# Altium PCB Control Board.PcbDoc
Units mm, origin at the board's own origin, x right, y up, seen from the top; angles counter-clockwise.
Board outline 55 x 12 mm, 2 copper layers (Top Layer, Bottom Layer); 18 components, 13 nets, 57 pads, 0 vias.
Unrouted connection lines stored in the file: 30.
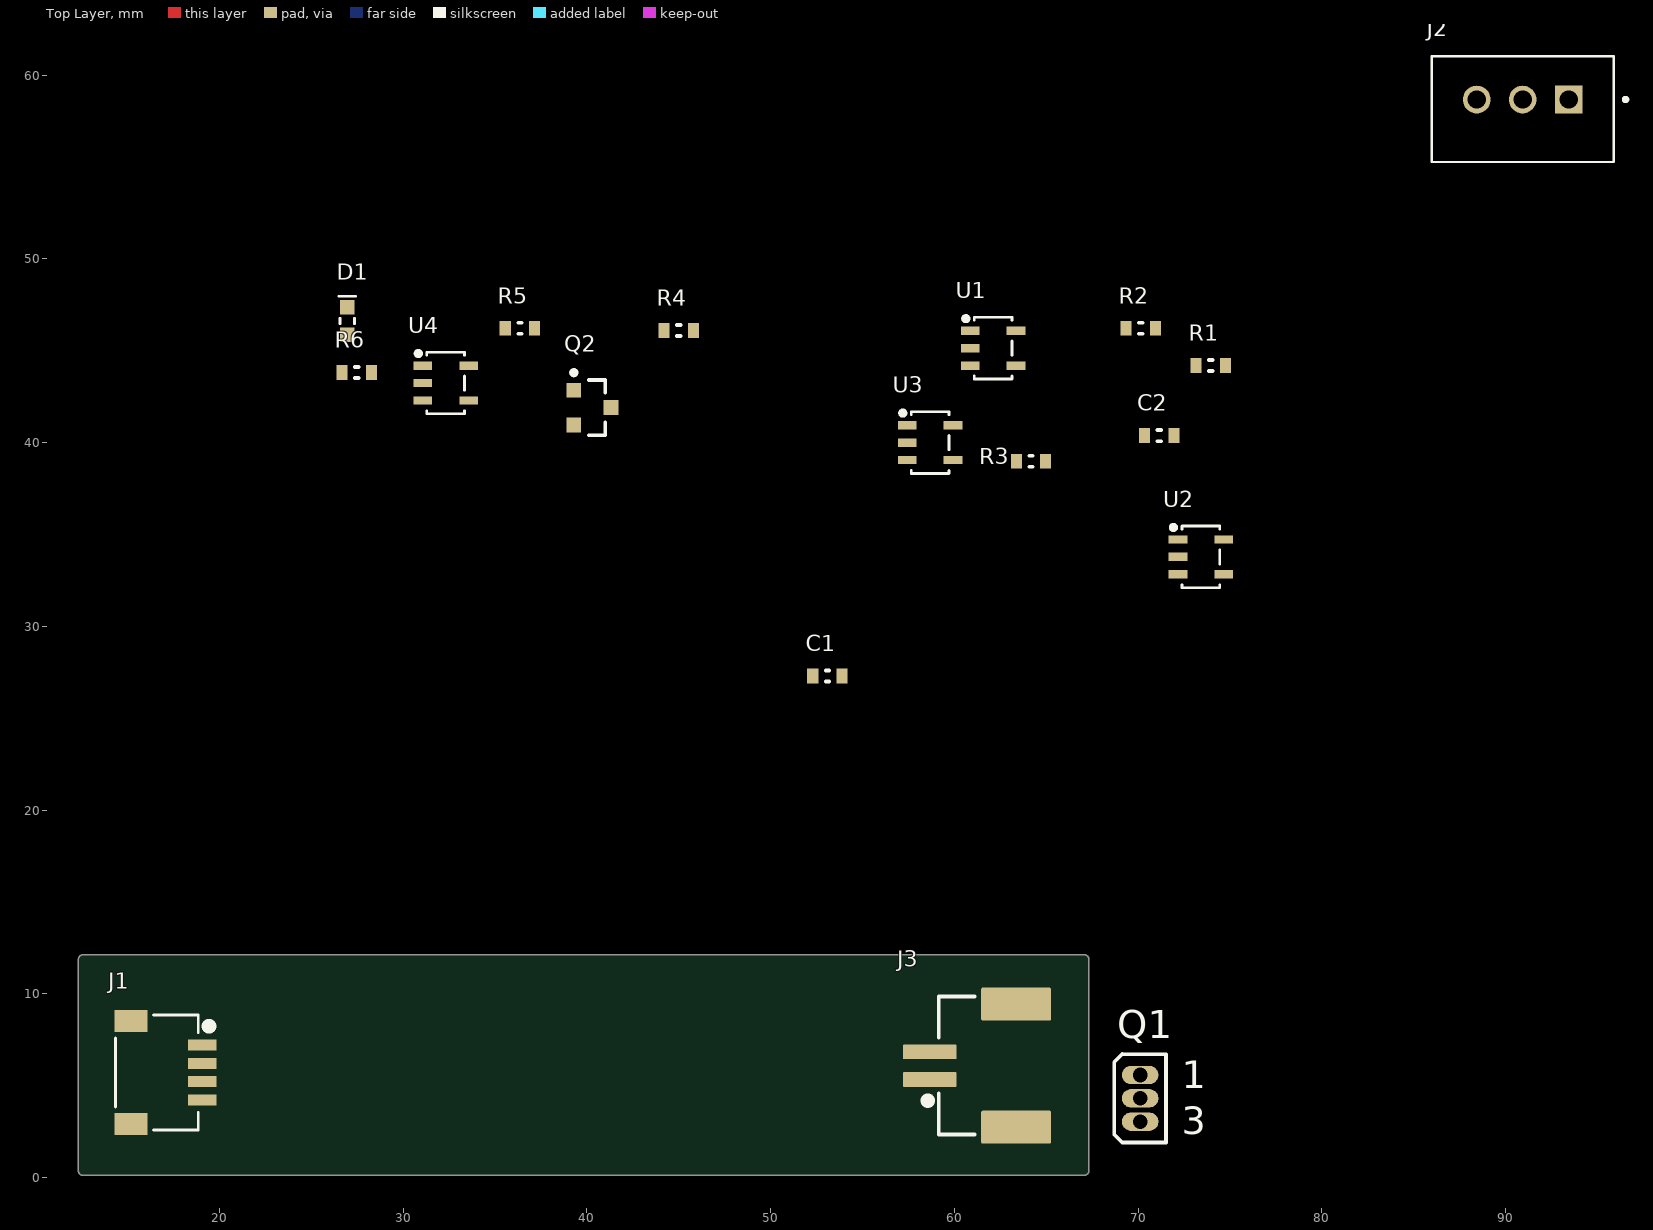
[diagram p0: Top Layer view]
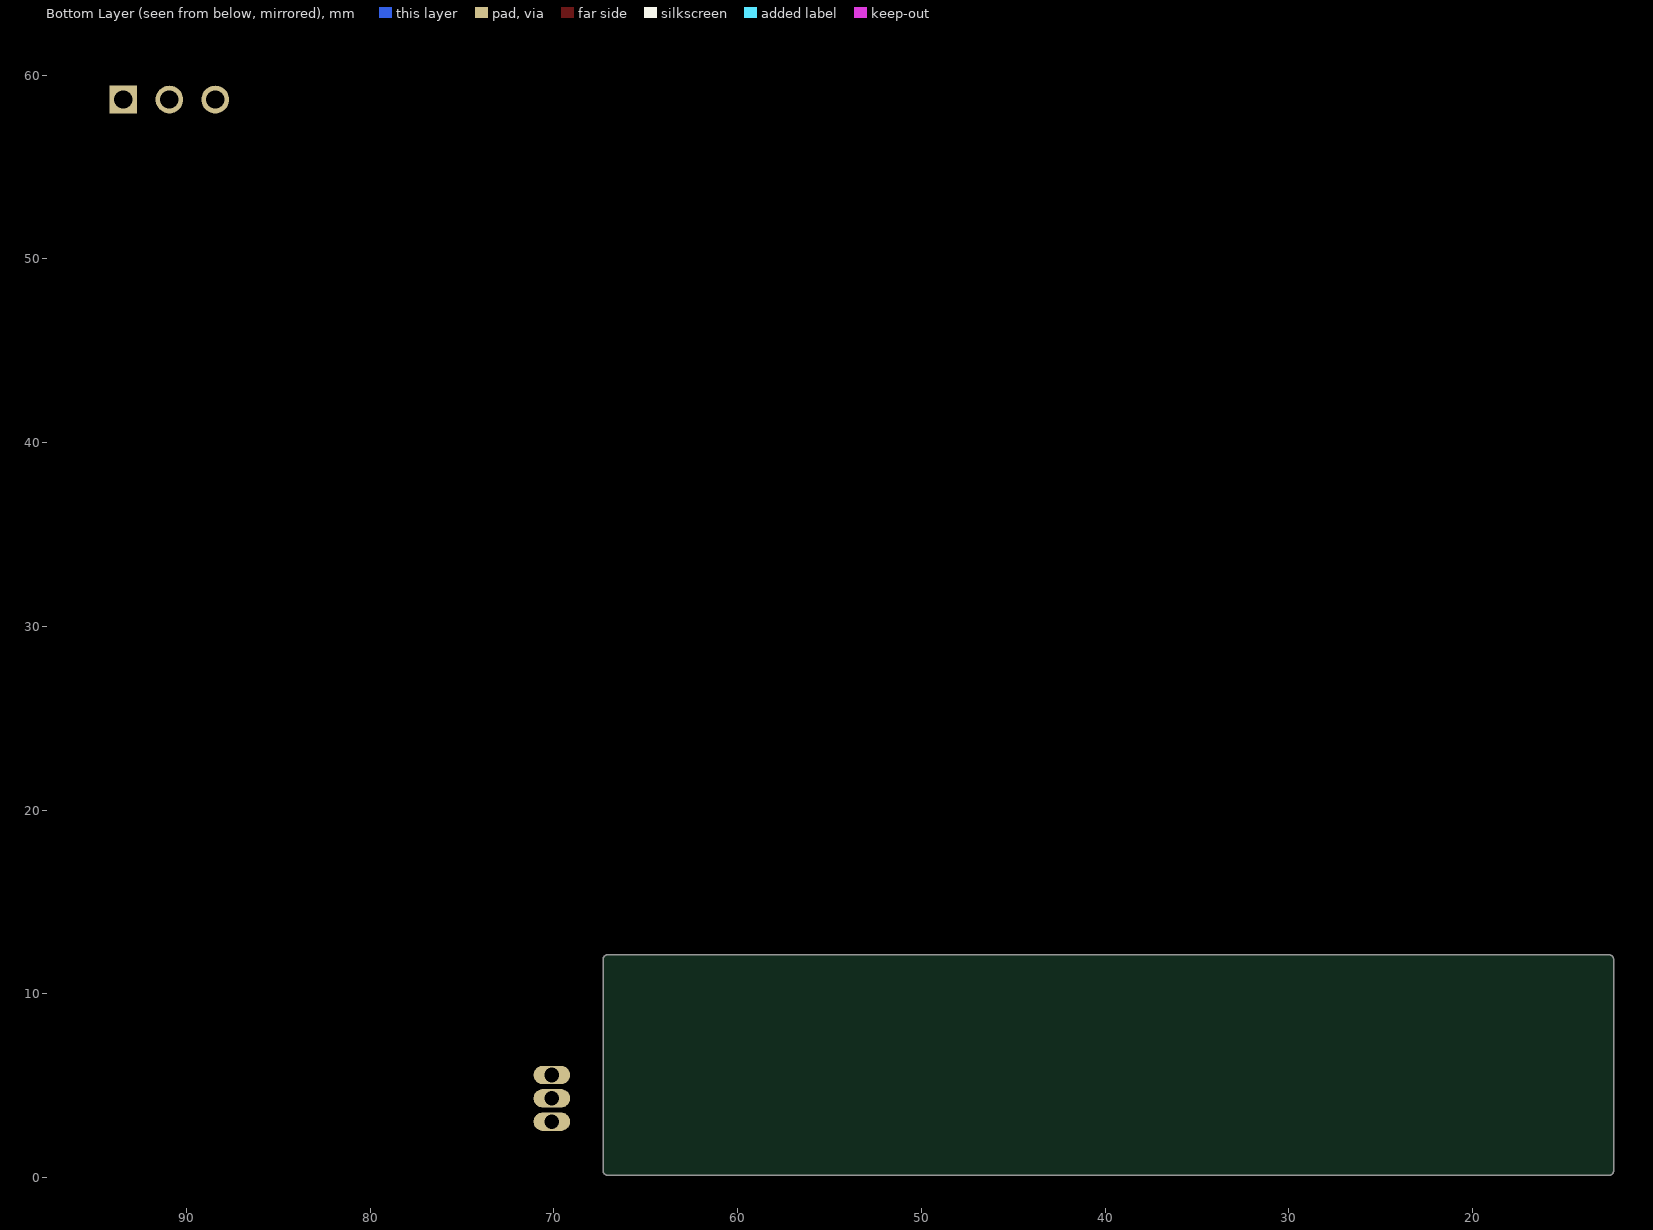
[diagram p1: Bottom Layer view, seen from below]

## Layer stack, top to bottom
Top Solder: solder mask 0.0102, Solder Resist, Dk 3.5
Top Layer: signal copper 0.0356
Dielectric 1: dielectric 0.32, FR-4, Dk 4.8
Bottom Layer: signal copper 0.0356
Bottom Solder: solder mask 0.0102, Solder Resist, Dk 3.5

## Board outline
12.319,0.381 12.319,11.873 cw(c12.573,11.873) 12.573,12.127 67.065,12.127 cw(c67.065,11.873) 67.319,11.873 67.319,0.381 cw(c67.065,0.381) 67.065,0.127 12.573,0.127 cw(c12.573,0.381)

## Design rules (kind name [scope] priority, off if disabled: settings)
Clearance [All] p1: gap=0.254 ignorepadtopadclearanceinfootprint=FALSE except(0: Arc-Hole Track-Hole SMDPad-Hole THPad-Hole Via-Hole Fill-Hole Poly-Hole Region-Hole Text-Hole)
PolygonConnect [All] p1: connectstyle=Relief reliefconductorwidth=0.254 reliefentries=4 polygonreliefangle="90 Angle" airgapwidth=0.254
RoomDefinition "Control Board" [InComponentClass('Control Board')] p1: confinementstyle=ConfineIn formatcopy=TRUE lockcomponents=FALSE outline 68.453,1.651 73.66,1.651 73.66,9.525 68.453,9.525
RoutingVias [All] p1: holewidth=0.711 width=1.27 viastyle="Through Hole" minholewidth=0.711 minwidth=1.27 maxholewidth=0.711 maxwidth=1.27
SolderMaskExpansion [All] p1: expansion=0.102 istentingtop=FALSE
Width [All] p1: maxlimit=0.254 minlimit=0.254 preferedwidth=0.254
30 further rules are at their usual default settings.

## Components (designator, comment, footprint, x,y, rotation, side; value= is the part's Value field where it differs from the comment)
C1 "0.10uF" 0603 53.086,27.305 r0 top
C2 "0.10uF" 0603 71.149,40.386 r0 top
D1 "0603 2V" "0603 - LED" 26.953,46.621 r90 top
J1 "SM04B-SRSS-TB(LF)(SN)" CONN_SM04B_JST 19.05,7.223 r270 top
J2 "B3B-XH-A(LF)(SN)" JST_B3B-XH-A(LF)(SN) 90.923,58.674 r180 top
J3 "SM02B-ZESS-TB(LF)(SN)" CONN_SM02B-ZESS-TB_JST 62.357,6.096 r90 top
Q1 "MOSFET-P" E3 70.104,4.318 r0 top
Q2 "CJ2305" JSCJ-SOT23-3_V 40.294,41.91 r0 top
R1 "JUMPER" 0603 73.943,44.196 r0 top value=0
R2 "JUMPER" 0603 70.133,46.228 r0 top value=0
R3 "JUMPER" 0603 64.164,38.989 r0 top value=0
R4 "JUMPER" 0603 44.987,46.101 r0 top value=0
R5 "1.1k" 0603 36.351,46.228 r0 top
R6 "JUMPER" 0603 27.461,43.815 r0 top value=0
U1 "REF2030QDDCRQ1" SOT-23-5_MC_MCH-L 60.862,46.096 r0 top
U2 "MCP6541RT-E/OT" SOT-23-5_MC_MCH-L 72.165,34.732 r0 top
U3 "SN74AHC1G08DBV3" SOT-23-5_MC_MCH-L 57.433,40.955 r0 top
U4 "MCP6541RT-E/OT" SOT-23-5_MC_MCH-L 31.068,44.196 r0 top

## Footprints (in the part's own frame and the unit in brackets; to place one, negate y for a bottom-side part, rotate by r counter-clockwise, add the part's x,y. Pads: shape width x height; smd on the part's side, far side on the other; paste and mask are expansions set on the pad)
0603 [mm] "Chip Resistor, 2-Leads, Body 1.60x0.80mm, IPC High Density"
  rect 0.6x0.8 smd mask+0.1: 1(-0.8,0) 2(0.8,0)
  silkscreen extent -0.1,-0.3 0.1,0.3, body extent -0.8,-0.4 0.8,0.4, height 0.6
"0603 - LED" [mm]
  rect 0.8x0.8 smd: 1(-0.75,0) 2(0.75,0)
  silkscreen extent -0.15,-0.45 1.35,0.45, body extent -0.8,-0.4 0.8,0.4, height 0.65
CONN_SM02B-ZESS-TB_JST [mm]
  rrect10% 1.8x3.8 smd: 0(-3.35,-0.994) 0(3.35,-0.994)
  rrect10% 0.8x2.9 smd: 1(-0.75,3.706) 2(0.75,3.706)
  silkscreen extent -3.75,1.27 3.76,3.81, body extent -3.75,-4.29 3.75,4.41, height 5.9
CONN_SM04B_JST [mm]
  rect 1.2x1.8 smd: 0(-1.3,-3.875) 0(4.3,-3.875)
  rect 0.6x1.55 smd: 1(0,0) 2(1,0) 3(2,0) 4(3,0)
  silkscreen extent -1.62,-4.7 4.62,0.38, body extent -1.5,-4.58 4.5,0.37, height 2.96
E3 [mm] "TO, Flat Index; 3 In-Line, Axial Leads; Body Dia. 4.6mm; Lead Dia. 0.5 mm (max)"
  oval 2x1 hole 0.8: 1(0,1.27) 2(0,0) 3(0,-1.27)
  silkscreen extent -1.41,-2.41 1.41,2.41
JSCJ-SOT23-3_V [mm] "SOT23, 3-Leads, Body 3x1.4mm, Pitch 0.95mm"
  rect 0.8x0.8 smd: 1(-1.01,0.95) 2(-1.01,-0.95) 3(1.01,0)
  silkscreen extent -1.13,-1.5 0.7,2.02, body extent -1.28,-1.5 1.28,1.5, height 1.15
JST_B3B-XH-A(LF)(SN) [mm]
  rect 1.508x1.508 hole 1: 1(-2.5,0)
  round 1.508 hole 1: 2(0,0) 3(2.5,0)
  silkscreen extent -5.7,-2.35 4.95,3.4, body extent -4.96,-2.35 4.94,3.4, height 7
SOT-23-5_MC_MCH-L [mil]
  rect 40x18 smd: 1(0,0) 2(0,-37.4) 3(0,-74.8) 4(98,-74.8) 5(98,0)
  silkscreen extent -15,-103 90,31, body extent -14,-98 112,24, height 57

## Part data
C1 C2: library part "CAP 0.10uF 16V", "CAP CER 0.10UF 16V X5R 0603", Operating Temperature="-55°C ~ 85°C", Package=0603/0805, Rating=16V, Temperature Coefficient=X5R, Tolerance=10%, Part Number="CAP 0.10uF 16V"
D1: library part "LED GREEN SMD 0603", "LED Uni-Color Green 574nm 2-Pin Chip LED T/R", Current Rating=20mA, Manufacturer Part Number 1=LTST-C190KGKT, Supplier Part Number 1=160-1435-1-ND, Voltage Rating - DC=2V, Part Number="LED GREEN SMD 0603", Pin Count=2, Supplier 1=Digi-Key, Supplier URL 1=https://www.digikey.ca/en/products/detail/lite-on-inc/LTST-C190KGKT/386815?s=N4IgTCBcDaIIwDYAMBaOAWAzAVjSgcgCIgC6AvkA
J1: library part "CN HDR 4POS JST SH_SR", "CONN HEADER SMD R/A 4POS 1MM", Mfr_Name=JST, Supplier Part Number 1=455-1804-1-ND, Copyright="Copyright (C) 2023 Ultra Librarian. All rights reserved.", Digi-Key_Part_Number_1=455-1804-2-ND, Digi-Key_Part_Number_2=455-1804-1-ND, Digi-Key_Part_Number_3=455-1804-6-ND, Manufacturer_Part_Number=SM04B-SRSS-TB(LF)(SN), Part Number="CN HDR 4POS JST SH_SR", Pin Count=4, RefDes=RefDes, Supplier 1=Digi-Key, Supplier URL 1=https://www.digikey.ca/en/products/detail/jst-sales-america-inc/SM04B-SRSS-TB-LF-SN/926710, Type=DEV
J2: library part "CN HDR 3POS JST XH", "Connector Header Through Hole 3 position 0.098 (2.50mm)", Package=None, Supplier Part Number 1=455-2248-ND, Availability="In Stock", Check_prices=https://www.snapeda.com/parts/B3B-XH-A(LF)(SN)/JST%20Sales%20America%20Inc./view-part/231271/?ref=eda, Manufacturer Part Number 1=B3B-XH-A(LF)(SN), MF="JST Sales", MP=B3B-XH-A(LF)(SN), Part Number="CN HDR 3POS JST XH", Price=None, SnapEDA_Link=https://www.snapeda.com/parts/B3B-XH-A(LF)(SN)/JST%20Sales%20America%20Inc./view-part/231271/?ref=snap, Supplier 1=Digi-Key, Supplier URL 1=https://www.digikey.com/en/products/detail/jst-sales-america-inc/B3B-XH-A-LF-SN/1651046
J3: library part "CN HDR 2POS JST ZE", "CONN HEADER SMD R/A 2POS 1.5MM", Manufacturer_Part_Number=SM02B-ZESS-TB, Mfr_Name=JST, Supplier Part Number 1=455-2395-1-ND, Copyright="Copyright (C) 2023 Ultra Librarian. All rights reserved.", Part Number="CN HDR 2POS JST ZE", Pin Count=2, RefDes=RefDes, Supplier 1=Digi-Key, Supplier URL 1=https://www.digikey.ca/en/products/detail/jst-sales-america-inc/SM02B-ZESS-TB-LF-SN/1887001, Type=DEV
Q1: "P-Channel MOSFET", LatestRevisionDate=17-Jul-2002, LatestRevisionNote="Re-released for DXP Platform.", PackageDescription="TO, Flat Index; 3 In-Line, Axial Leads; Body Dia. 4.6mm; Lead Dia. 0.5 mm (max)", PackageReference=E3, PackageVersion=1995/1996, Published=8-Jun-2000, Publisher="Altium Limited"
Q2: library part CMP-013-00015-3, "P-Channel Plastic Encapsulate MOSFET, 12 V, 4.1 A, 3-Pin SOT23, Tape and Reel", Case/Package=SOT23-3, Manufacturer="Jiangsu Changjiang Electronics Technology", Package Description="3-Pin Small Outline Transistor, Body 2.9 x 1.3 mm, Pitch 0.95 mm", Package Version="Rev. E, 09/2009", Datasheet URL=http://www.cj-elec.com/gallery/txUpfile/5140ba9ed47d18467ea4bddc055cd747.pdf, Datasheet Version="Rev. F, 04/2015", Mounting Technology=SM, Package Reference=SOT23-3, RoHS Compliant=Unknown
R1 R2 R3 R4 R6: library part "RES 0 JUMPER", "RES SMD 0 OHM JUMPER GENERIC 0603", Manufacturer Part Number 1=RK73Z1JTTD, Package=0805, Supplier Part Number 1=2019-RK73Z1JTTDCT-ND, Tolerance=N/A, Part Number="RES 0 JUMPER", Supplier 1=Digi-Key, Supplier URL 1=https://www.digikey.ca/en/products/detail/koa-speer-electronics-inc/RK73Z1JTTD/9845478
R5: library part "RES 1.1k 1/8W", "Default Resistor Symbol", Package=0805, Power (Watts)=0.125W, Tolerance=5%, Part Number="RES 1.1k 1/8W"
U1: "Series Voltage Reference IC Fixed 1.5V, 3V V ±0.05% 20 mA SOT-23-THIN", Manufacturer_Part_Number=SN74AHC1G08DBV3, Mfr_Name="Texas Instruments", Supplier Part Number 1=296-REF2030QDDCRQ1CT-ND, Copyright="Copyright (C) 2023 Ultra Librarian. All rights reserved.", Digi-Key_Part_Number_1=2156-SN74AHC1G08DBV3-ND, Digi-Key_Part_Number_2=296-SN74AHC1G08DBV3CT-ND, Digi-Key_Part_Number_3=296-SN74AHC1G08DBV3DKR-ND, Digi-Key_Part_Number_4=296-SN74AHC1G08DBV3TR-ND, Manufacturer Part Number 1=REF2030QDDCRQ1, Part Number=REF2030QDDCRQ1, RefDes=RefDes, Supplier 1=Digi-Key, Supplier URL 1=https://www.digikey.ca/en/products/detail/texas-instruments/REF2030QDDCRQ1/15926651?s=N4IgjCBcpg7LBOKoDGUBmBDANgZwKYA0IA9lANogCsVAHHSALrEAOALlCAMpsBOAlgDsA5iAC%2BxALQAmZCDSQ%2BAVyKkK1JmK1A, Type=DEV
U2 U4: library part "COMPARATOR MCP6541RT-EOT", "IC COMP 1.6V SNGL P-P SOT23-5", Supplier Part Number 1=MCP6541RT-E/OTCT-ND, Manufacturer Part Number 1=MCP6541RT-E/OT, Part Number="COMPARATOR MCP6541RT-EOT", Supplier 1=Digi-Key, Supplier URL 1=https://www.digikey.ca/en/products/detail/microchip-technology/MCP6541RT-E-OT/870211
U3: "IC GATE AND 1CH 2-INP SOT23-5", Mfr_Name="Texas Instruments", Supplier Part Number 1=296-SN74AHC1G08DBV3CT-ND, Copyright="Copyright (C) 2023 Ultra Librarian. All rights reserved.", Digi-Key_Part_Number_1=2156-SN74AHC1G08DBV3-ND, Digi-Key_Part_Number_2=296-SN74AHC1G08DBV3CT-ND, Digi-Key_Part_Number_3=296-SN74AHC1G08DBV3DKR-ND, Digi-Key_Part_Number_4=296-SN74AHC1G08DBV3TR-ND, Manufacturer Part Number 1=SN74AHC1G08DBV3, Manufacturer_Part_Number=SN74AHC1G08DBV3, Part Number=SN74AHC1G08DBV3, RefDes=RefDes, Supplier 1=Digi-Key, Supplier URL 1=https://www.digikey.ca/en/products/detail/texas-instruments/SN74AHC1G08DBV3/10434480, Type=DEV

## Nets (pads, with @x,y where several pads share a name; then routed paths per layer and width w, separated by ;. In a path a pad name is that pad's centre, name@x,y a point inside that pad or via, vN(x,y) a via of type N, cw(c..) or ccw(c..) an arc to the next point about the centre after c; other vN are vias at no path point)
+3.3: Q2.2 U1.3 U1.5 U2.5 U3.5 U4.5
GND: C1.1 C2.2 D1.2 J1.3 J2.2 Q2.1 R6.2 U1.2 U2.2 U3.3
NetC1_2: C1.2 U1.1 U2.3 U4.3
NetD1_1: D1.1 R5.2
NetJ1_1: J1.1 U4.4
NetJ1_2: J1.2 U2.4
NetJ2_1: J2.1 J3.2
NetJ2_3: J2.3 J3.1
NetR1_1: R1.1 R3.1 U3.4
NetR1_2: R1.2 R2.1 U2.1
NetR2_2: R2.2 U3.1
NetR4_1: R4.1 U3.2
NetR4_2: R4.2 R6.1 U4.1
pads on no net: C2.1 J1.0 J1.4 J3.0 Q1.1 Q1.2 Q1.3 Q2.3 R3.2 R5.1 U1.4 U4.2

## Silkscreen, mask and mechanical layers (free items; w line width, h text height)
Mechanical 1:
  the board outline again, w0.254

## Text inside footprints (layer, text, board x,y; h text height)
Q1: Top Overlay "1" at 72.379,4.873 h1.5; Top Overlay "3" at 72.379,2.355 h1.5